# Altium PCB LPCOSensor3vValve.PcbDoc
Units mil, origin at the board's own origin, x right, y up, seen from the top; angles counter-clockwise.
Board outline 1970 x 1970 mil, 2 copper layers (Top Layer, Bottom Layer); 32 components, 32 nets, 110 pads, 39 vias.
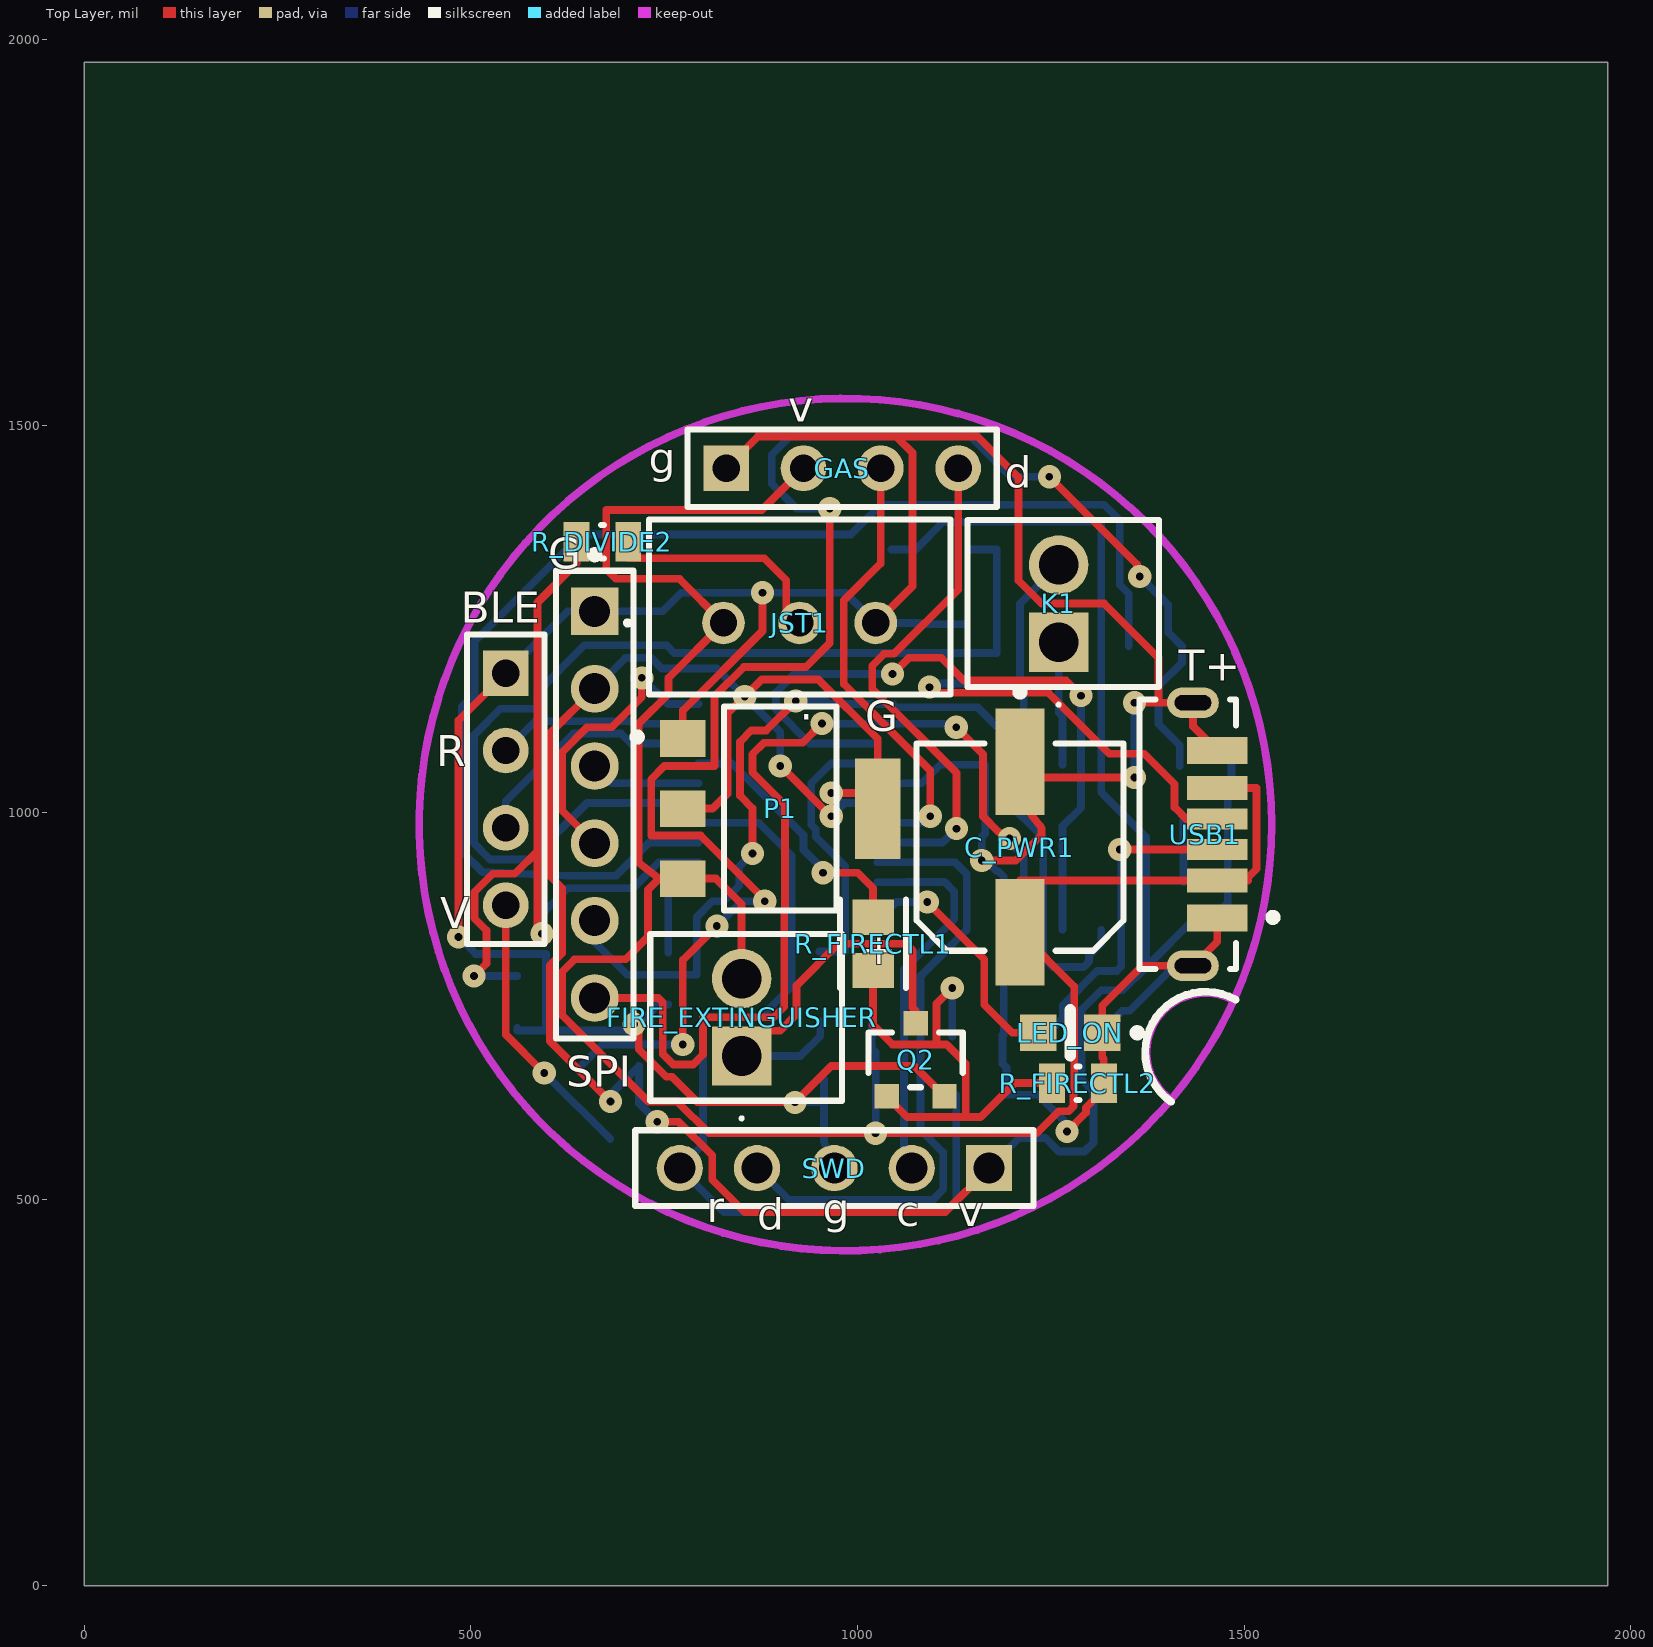
[diagram p0: Top Layer view]
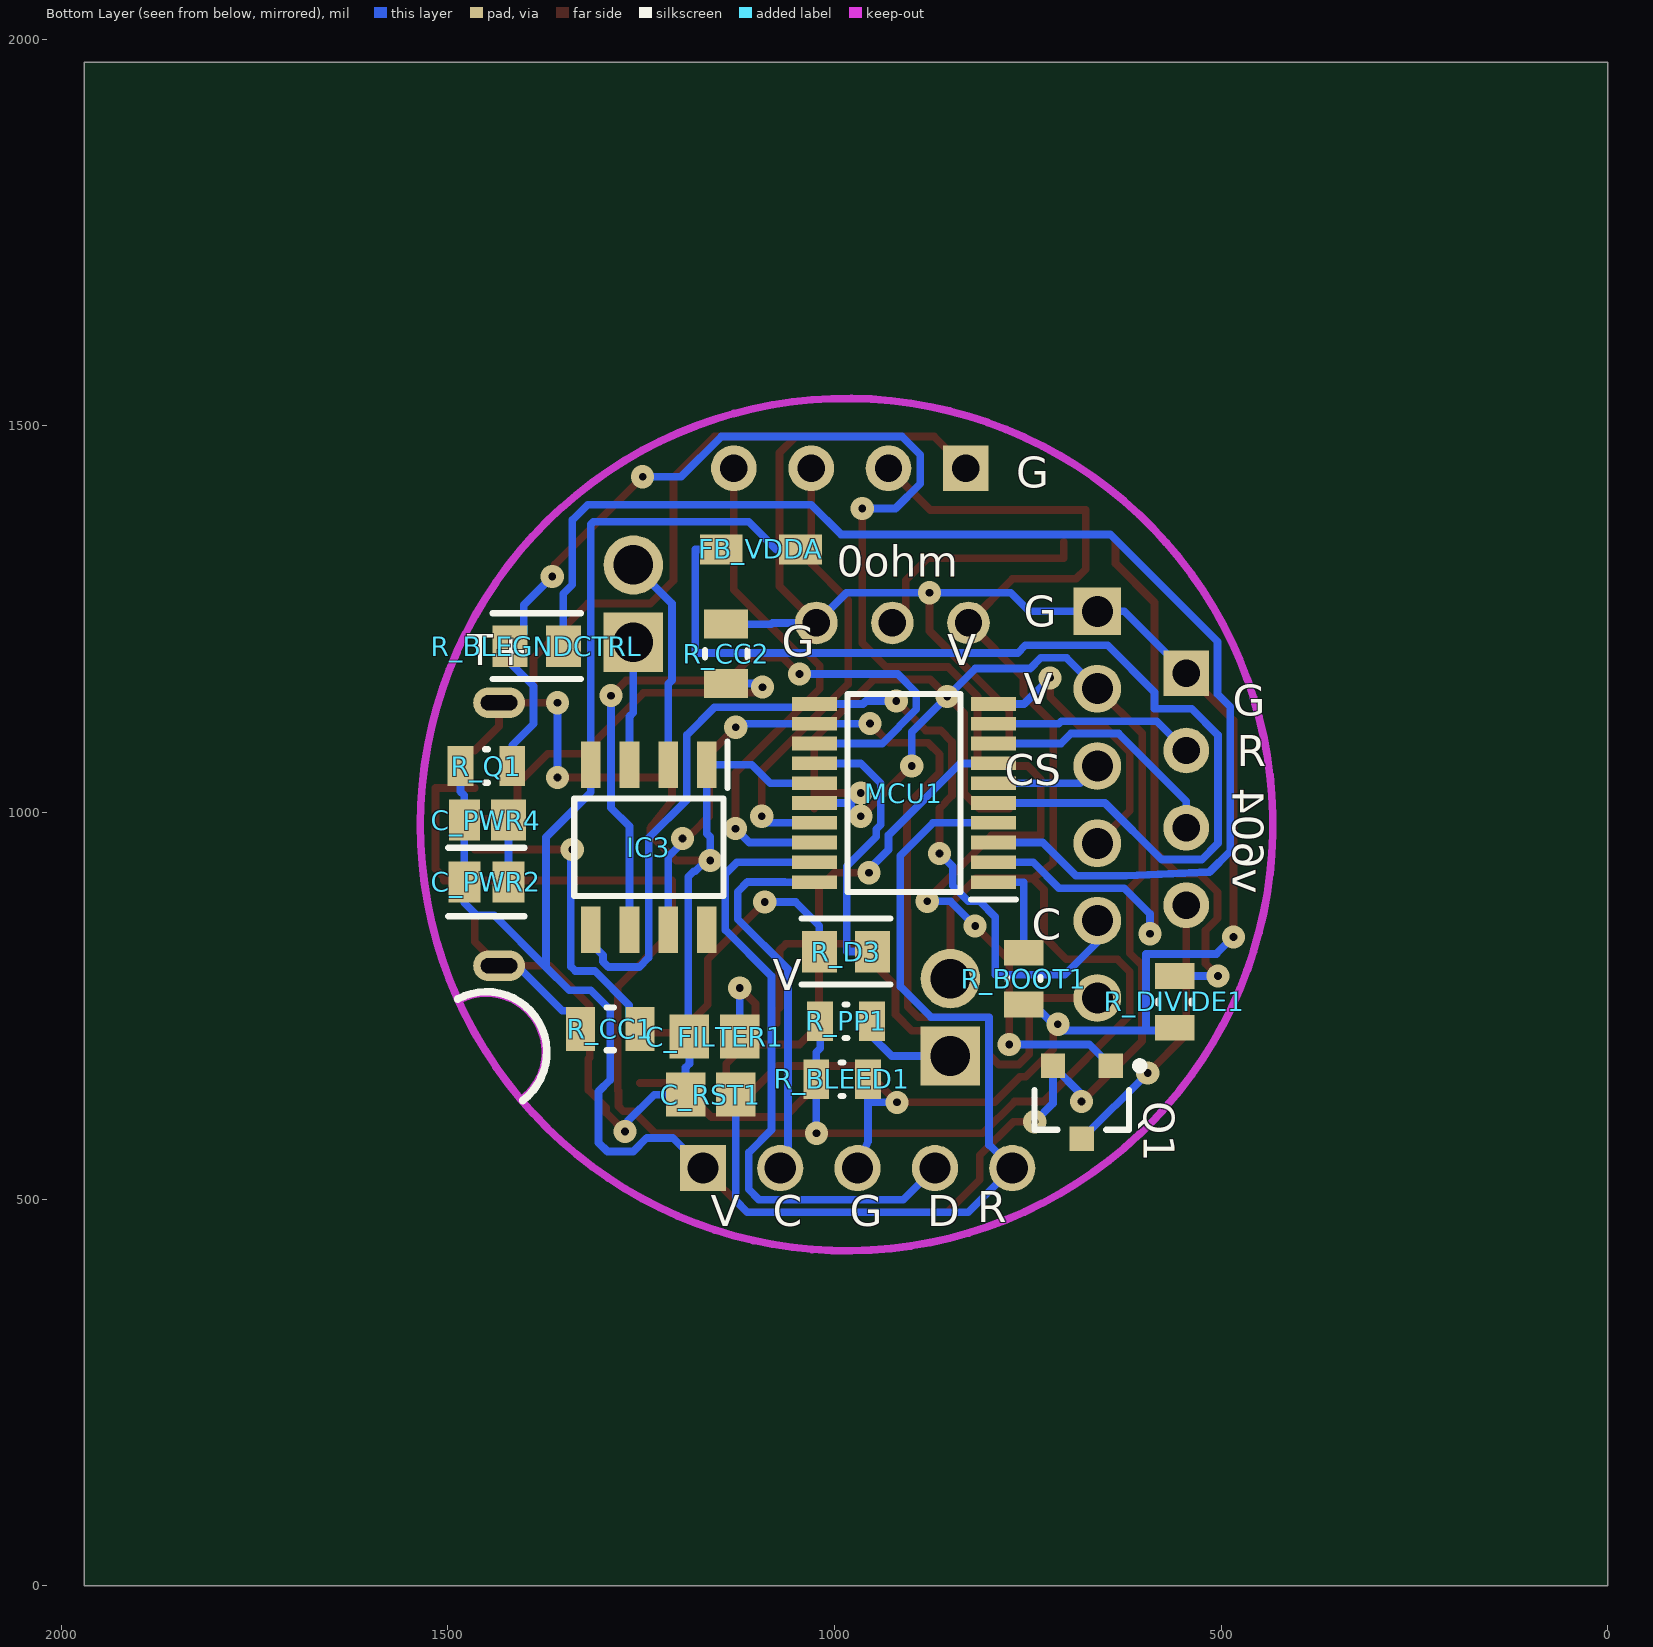
[diagram p1: Bottom Layer view, seen from below]
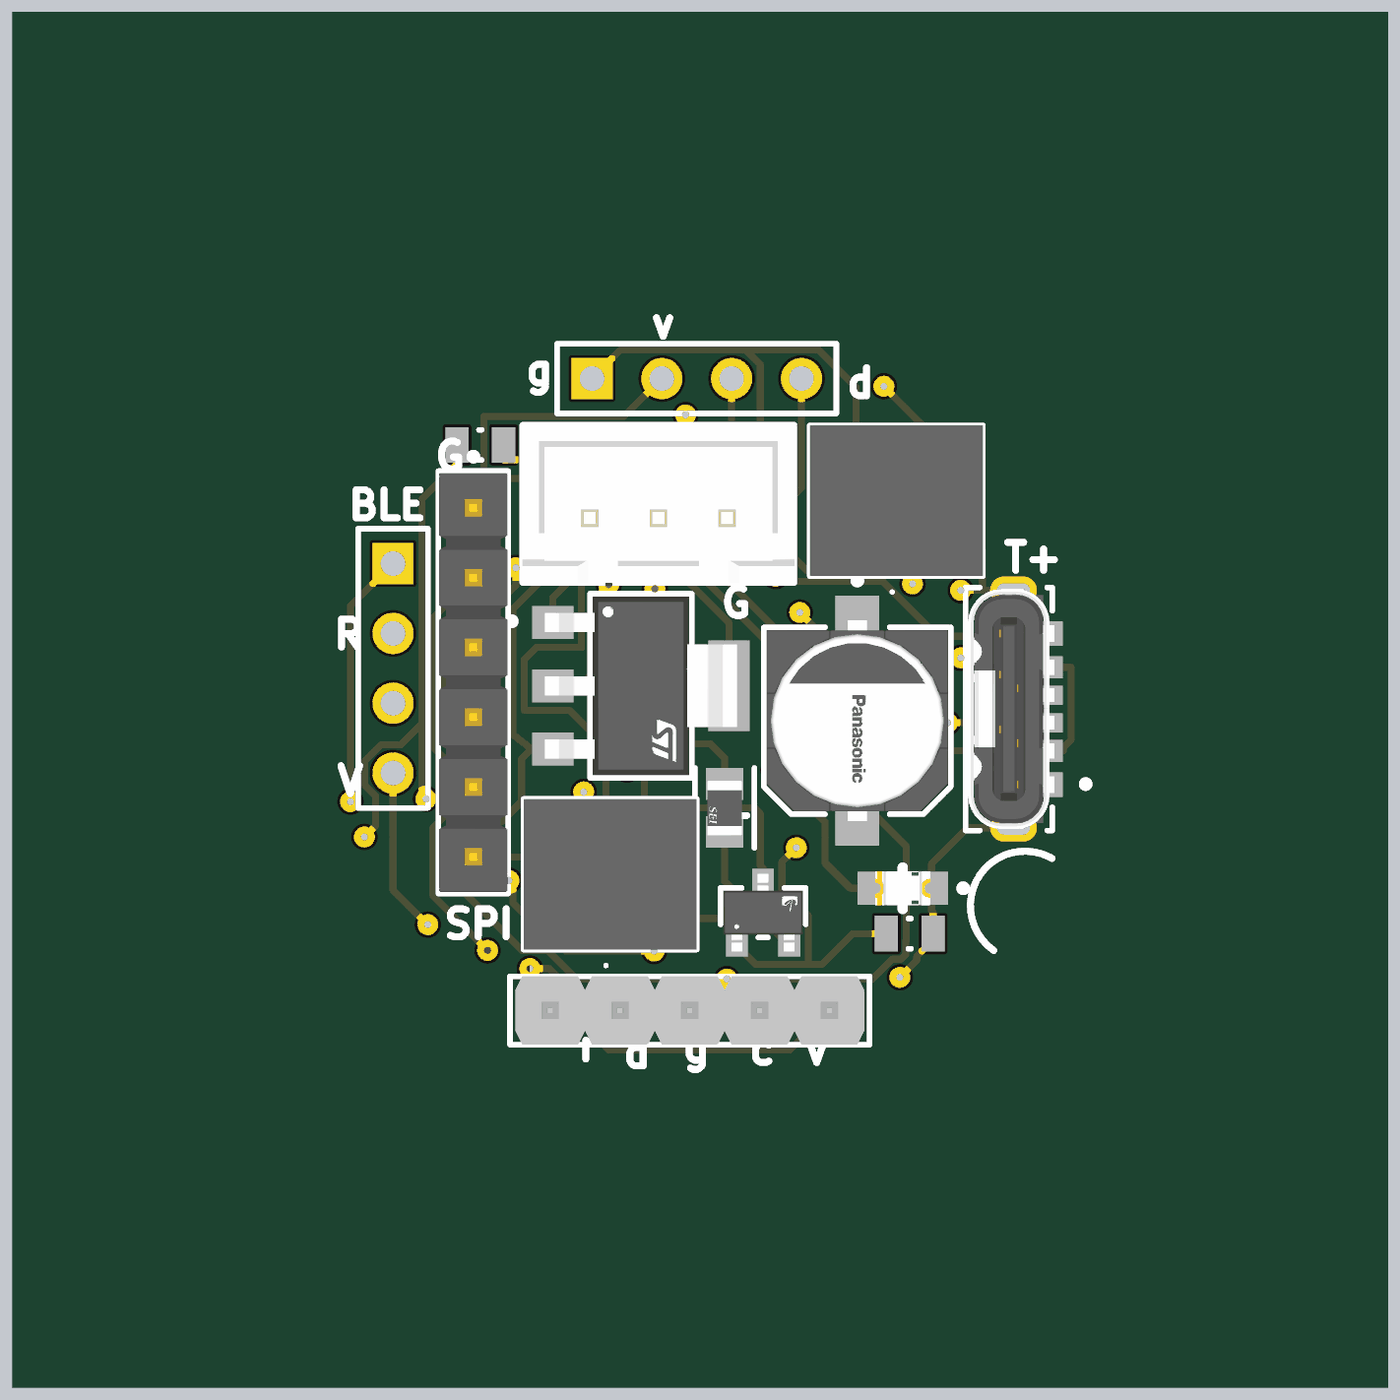
[diagram p2: 3D render of the assembled board from above, using the file's embedded part models]
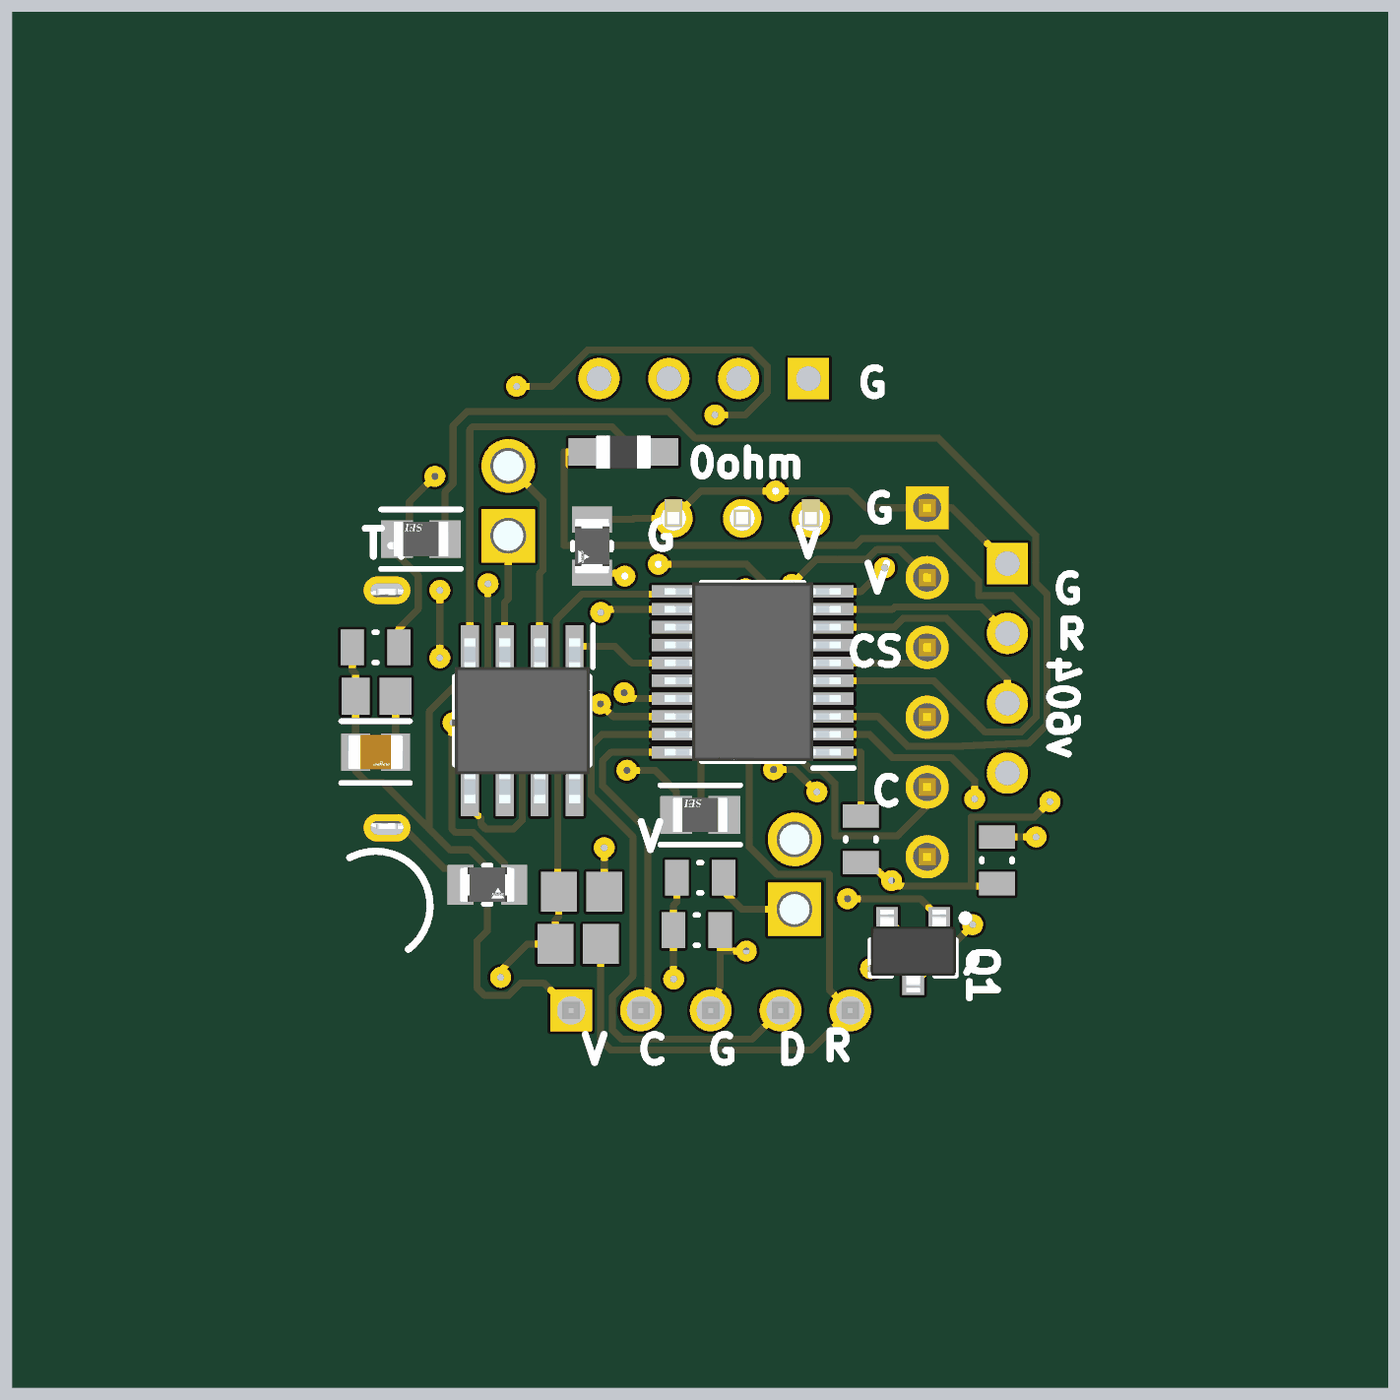
[diagram p3: 3D render of the assembled board from below, using the file's embedded part models]

## Layer stack, top to bottom
Top Solder: solder mask 0.4, Solder Resist, Dk 3.5
Top Layer: signal copper 1.4
Dielectric 1: dielectric 12.6, FR-4, Dk 4.8
Bottom Layer: signal copper 1.4
Bottom Solder: solder mask 0.4, Solder Resist, Dk 3.5

## Board outline
0,0 1970,0 1970,1970 0,1970

## Design rules (kind name [scope] priority, off if disabled: settings)
Clearance [All] p1: gap=6 ignorepadtopadclearanceinfootprint=FALSE except(15: SMDPad-Via THPad-Via)
HoleSize [All] p1: absolutevalues=TRUE maxlimit=100 minlimit=6 maxpercent=80.000 minpercent=20.000
PolygonConnect [All] p1: connectstyle=Relief reliefconductorwidth=10 reliefentries=4 polygonreliefangle="90 Angle" airgapwidth=10
RoutingVias [All] p1: holewidth=10 width=30 viastyle="Through Hole" minholewidth=10 minwidth=30 maxholewidth=28 maxwidth=50
SolderMaskExpansion [All] p1: expansion=4 istentingtop=FALSE
Width [All] p1: maxlimit=30 minlimit=10 preferedwidth=10
29 further rules are at their usual default settings.

## Components (designator, comment, footprint, x,y, rotation, side; value= is the part's Value field where it differs from the comment)
BLE "Header BLE" HDR1X4 545,1180 r270 top
C_FILTER1 "VJ0805Y104MXAAT" CAPC2013X145X48NL20T23 1155,710 r180 bottom
C_PWR1 "16SVPG220M" FP-OS-CON-SMT-C6-MFG 1210,955 r270 top
C_PWR2 "GRM21BR61A476ME15K" FP-GRM21B-0_2-e0_2_0_7-IPC_C 1450,910 r180 bottom
C_PWR4 "08053C103JAT2A" CAPC2013X94X50LL20T25 1450,990 r0 bottom
C_RST1 "VJ0805Y104MXAAT" CAPC2013X145X48NL20T23 1160,635 r180 bottom
FB_VDDA "0ohm" WE-CBF_0805_L2W1.2H0.9_HC 1095,1340 r180 bottom
FIRE_EXTINGUISHER "KF128-2.54-2P" KF1282542P 850,685 r90 top
GAS "Header I2C" HDR1X4 830,1445 r0 top
IC3 "MAX31855JASA+" SOIC127P600X175-8N 1240,955 r270 bottom
JST1 "B3B-XH-A_LF__SN_" B3BXHALFSN 826.57,1245 r0 top
K1 "KF128-2.54-2P" KF1282542P 1260,1220 r90 top
LED_ON "WHITE LED 3.0v20ma" FP-SML-LX0805UWC-TR-MFG 1275,715 r180 top
MCU1 "STM32L031F6P6" SOP65P640X120-20N 910,1025 r0 bottom
P1 "LD1117S33" FP-SOT-223-0046067_14-MFG 900,1005 r0 top
Q1 "AO3401A" AO-SOT-23-3L_V 680,625 r270 bottom
Q2 "AO3400A" FP-SOT23-MFG 1075,680 r90 top
R_BLEED1 "10K 5% 0805(2012)" RESC0805(2012)_L 990,655 r180 bottom value="10000.00 Ohm"
R_BLEGNDCTRL "RMCF0805JT180R" FP-RMCF0805-IPC_B 1385,1215 r0 bottom
R_BOOT1 "10K 5% 0805(2012)" RESC0805(2012)_L 755,785 r270 bottom value="10000.00 Ohm"
R_CC1 "CRCW08055K10JNEAHP" FP-CRCW0805-HPe3-MFG 1290,720 r0 bottom
R_CC2 "CRCW08055K10JNEAHP" FP-CRCW0805-HPe3-MFG 1140,1205 r90 bottom
R_D3 "RMCF0805JT180R" FP-RMCF0805-IPC_B 985,820 r0 bottom
R_DIVIDE1 "10K 5% 0805(2012)" RESC0805(2012)_L 560,755 r90 bottom value="10000.00 Ohm"
R_DIVIDE2 "10K 5% 0805(2012)" RESC0805(2012)_L 670,1350 r0 top value="10000.00 Ohm"
R_FIRECTL1 "RMCF0805JT180R" FP-RMCF0805-IPC_B 1020,830 r270 top
R_FIRECTL2 "10K 5% 0805(2012)" RESC0805(2012)_L 1285,650 r180 top value="10000.00 Ohm"
R_PP1 "10K 5% 0805(2012)" RESC0805(2012)_L 985,730 r180 bottom value="10000.00 Ohm"
R_Q1 "10K 5% 0805(2012)" RESC0805(2012)_L 1450,1060 r180 bottom value="10000.00 Ohm"
SPI "HTSW-106-07-G-S" FP-HTSW-106-07-G-S-MFG 660,1010 r270 top
SWD "MTLW-105-05-T-S-190" SMTC-MTLW-105-05-X-S-190 1170,540 r180 top
USB1 "217178-0001" FP-217178-0001-MFG 1427.01,971.73 r270 top

## Footprints (in the part's own frame and the unit in brackets; to place one, negate y for a bottom-side part, rotate by r counter-clockwise, add the part's x,y. Pads: shape width x height; smd on the part's side, far side on the other; paste and mask are expansions set on the pad)
AO-SOT-23-3L_V [mm] "SOT23, 3-Leads, Body 3.1x1.8mm, Pitch 0.95mm"
  rect 0.8x0.8 smd: 1(-1.2,0.95) 2(-1.2,-0.95) 3(1.2,0)
  silkscreen extent -1.32,-1.55 0.9,2.02, body extent -1.5,-1.55 1.5,1.55, height 1.25
B3BXHALFSN [mm]
  round 1.4 hole 0.9: 1(0,0) 2(2.5,0) 3(5,0)
  silkscreen extent -3.2,-2.35 7.45,3.4, body extent -2.45,-2.35 7.45,3.4, height 7.09
CAPC2013X94X50LL20T25 [mm] "Chip Capacitor, 2-Leads, Body 2.01x1.25mm, IPC High Density"
  rect 1.15x1.35 smd: 1(-0.725,0)
  rect 1.016x1.35 smd: 2(0.725,0)
  body extent -1.1,-0.72 1.1,0.72, height 0.94
CAPC2013X145X48NL20T23 [mm] "Chip Capacitor, 2-Leads, Body 2.00x1.25mm, IPC Medium Density"
  rect 1.3x1.45 smd: 1(-0.825,0) 2(0.825,0)
  body extent -1.1,-0.72 1.1,0.72, height 1.45
FP-217178-0001-MFG [mm]
  rrect100% 1x1.7 hole 1.2 slot 0.5 at 0 deg paste-1000 mask+0: 1(-4.32,0.17) 2(4.32,0.17)
  rect 0.7x1.99 smd paste+0 mask+0: A5(0.5,0.965) B5(-0.5,0.965)
  rect 0.8x1.99 smd paste+0 mask+0: A9(-1.52,0.965) B9(1.52,0.965)
  rect 0.9x1.99 smd paste+0 mask+0: A12(-2.75,0.965) B12(2.75,0.965)
  silkscreen extent -4.42,-1.58 4.42,2.92, body extent -4.92,-1.68 4.92,2.06, height 0.25
FP-CRCW0805-HPe3-MFG [mm]
  rect 0.95x1.45 smd paste+0 mask+0: 1(-0.975,0) 2(0.975,0)
  silkscreen extent -0.13,-0.7 0.12,0.7, body extent -1,-0.63 1,0.63, height 0.6
FP-GRM21B-0_2-e0_2_0_7-IPC_C [mil]
  rect 41.52x53.39 smd paste+0 mask+0: 1(-28.57,0) 2(28.57,0)
  silkscreen extent -49,-44 49,44, body extent -39,-25 39,25, height 57
FP-HTSW-106-07-G-S-MFG [mm]
  rect 1.57x1.57 hole 1.02 paste-1000 mask+0: 1(-6.35,0)
  round 1.57 hole 1.02 paste-1000 mask+0: 2(-3.81,0) 3(-1.27,0) 4(1.27,0) 5(3.81,0) 6(6.35,0)
  silkscreen extent -8.33,-1.27 7.68,1.27, body extent -7.78,-1.37 7.78,1.37, height 0.25
FP-OS-CON-SMT-C6-MFG [mm]
  rect 3.5x1.6 smd paste+0 mask+0: 1(-2.8,0) 2(2.8,0)
  silkscreen extent -5.22,-3.4 3.4,3.4, body extent -4.8,-3.65 4.8,3.65, height 0.25
FP-RMCF0805-IPC_B [mil]
  rect 45.46x53.63 smd paste+0 mask+0: 1(-34.48,0) 2(34.48,0)
  silkscreen extent -57,-43 57,43, body extent -39,-25 39,25, height 26
FP-SML-LX0805UWC-TR-MFG [mm]
  rect 1.2x1.2 smd paste+0 mask+0: 1(-1.05,0) 2(1.05,0)
  silkscreen extent -2.33,-0.75 0,0.75, body extent -1.75,-0.85 1.75,0.85, height 0.25
FP-SOT23-MFG [mm]
  rect 0.8x0.8 smd paste+0 mask+0: 1(-1.2,0.95) 2(-1.2,-0.95) 3(1.2,0)
  silkscreen extent -0.9,-1.55 0.9,1.55, body extent -1.7,-1.78 1.7,1.78, height 0.25
FP-SOT-223-0046067_14-MFG [mm]
  rect 1.5x1.2 smd paste+0 mask+0: 1(-3.2,2.3) 2(-3.2,0) 3(-3.2,-2.3)
  rect 1.5x3.3 smd paste+0 mask+0: 4(3.2,0)
  silkscreen extent -4.82,-3.35 1.85,3.35, body extent -4.05,-3.45 4.05,3.45, height 0.25
HDR1X4 [mm] "Connector; Header; 4 Position"
  rect 1.5x1.5 hole 0.9: 1(0,0)
  round 1.5 hole 0.9: 2(2.54,0) 3(5.08,0) 4(7.62,0)
  silkscreen extent -1.27,-1.27 8.89,1.27
KF1282542P [mm]
  rect 1.95x1.95 hole 1.3: 1(0,0)
  round 1.95 hole 1.3: 2(2.54,0)
  silkscreen extent -2.1,-3.3 4.01,3, body extent -1.47,-3.3 4.01,3, height 9.2
RESC0805(2012)_L [mm] "Chip Resistor, Body 2.0x1.3mm, IPC High Density"
  rect 0.85x1.3 smd: 1(-0.85,0) 2(0.85,0)
  silkscreen extent -0.05,-0.55 0.05,0.55, body extent -1.1,-0.67 1.1,0.68, height 0.7
SMTC-MTLW-105-05-X-S-190 [mm] "Terminal Assembly, 1x5 Pins, Vertical, 2.54mm Pitch, Male"
  rect 1.52x1.52 hole 1.02: 1(0,0)
  round 1.52 hole 1.02: 2(2.54,0) 3(5.08,0) 4(7.62,0) 5(10.16,0)
  silkscreen extent -1.46,-1.24 11.62,1.24, body extent -1.27,-1.24 11.43,1.24, height 6.35
SOIC127P600X175-8N [mm]
  rect 1.525x0.65 smd: 1(-2.712,1.905) 2(-2.712,0.635) 3(-2.712,-0.635) 4(-2.712,-1.905) 5(2.712,-1.905) 6(2.712,-0.635) 7(2.712,0.635) 8(2.712,1.905)
  silkscreen extent -3.47,-2.45 1.6,2.58, body extent -3,-2.45 3,2.45, height 1.75
SOP65P640X120-20N [mm]
  rect 1.475x0.45 smd: 1(-2.938,2.925) 2(-2.938,2.275) 3(-2.938,1.625) 4(-2.938,0.975) 5(-2.938,0.325) 6(-2.938,-0.325) 7(-2.938,-0.975) 8(-2.938,-1.625) 9(-2.938,-2.275) 10(-2.938,-2.925) 11(2.938,-2.925) 12(2.938,-2.275) 13(2.938,-1.625) 14(2.938,-0.975) 15(2.938,-0.325) 16(2.938,0.325) 17(2.938,0.975) 18(2.938,1.625) 19(2.938,2.275) 20(2.938,2.925)
  silkscreen extent -3.68,-3.25 1.85,3.5, body extent -3.2,-3.25 3.2,3.25, height 1.2
WE-CBF_0805_L2W1.2H0.9_HC [mm] "SMD EMI Suppression Ferrite  Bead, body 2.00x1.20mm"
  rect 1.4x1 smd: 1(-1.3,0) 2(1.3,0)
  body extent -1,-0.6 1,0.6, height 0.9

## Part data
BLE GAS: library part "Header 4", "Header, 4-Pin", LatestRevisionDate=17-Jul-2002, LatestRevisionNote="Re-released for DXP Platform.", Publisher="Altium Limited"
C_FILTER1 C_RST1: library part CMP-2007-01733-1, Manufacturer=Vitramon, Part Number=VJ0805Y104MXAAT
C_PWR1: library part CMP-05428-000859-1, "Conductive Polymer Aluminum Solid Capacitors (OS-CON) 220uF ±20% 16V"
C_PWR2: library part CMP-06035-042633-1, "Chip Multilayer Ceramic Capacitors for General Purpose, 0805, 47uF, X5R, 15%, 20%, 10V", Capacitance=47uF, Case Code (Imperial)=0805, Case Code (Metric)=2012, Dielectric=X5R, Max Operating Temperature=85°C, Min Operating Temperature=-55°C, Package Quantity=10000, Tolerance=20%, Voltage Rating=10V, Case/Package=0805, Length=0.079inch, Mount="Surface Mount", Packaging="Tape and Reel", Termination=SMD/SMT, Thickness=0.057inch, Voltage Rating (DC)=10V, Weight=0.000335oz, Width=0.049inch
C_PWR4: library part CMP-2007-04234-1, Manufacturer="AVX Interconnect / Elco", Part Number=08053C103JAT2A
FB_VDDA: library part CMP-0220-00029-2, Case Code (Imperial)=0805, Case Code (Metric)=2012, Case/Package=SMD/SMT, Current Rating=2A, DC Resistance (DCR)=50mΩ, Inductance=5.6H, Max Operating Temperature=125°C, Min Operating Temperature=-55°C, Test Frequency=100MHz, Tolerance=25%, Core Material=Ferrite, Depth=1.2mm, Height=900µm, Impedance=220Ω, Lead Free="Lead Free", Length=2mm, Material=Ferrite, Max Current Rating=2A, Max DC Current=2A, Mount="Surface Mount", NexarPartId=7861696, Number of Lines=1, Packaging=Digi-Reel®, REACH SVHC=Unknown, Resistance=50mΩ, RoHS=Compliant, Termination=SMD/SMT, Weight=10.999615mg, Width=1.2mm
FIRE_EXTINGUISHER K1: "Connector", Manufacturer_Name="CIXI KEFA ELECTRONICS", Datasheet Link=https://jirorwxhqiillo5p.ldycdn.com/KF128-2.54-aidqpBpqKirRliSqmrqirlki.pdf, Height=9.1mm, Manufacturer_Part_Number=KF128-2.54-2P
IC3: "Integrated Circuit", Manufacturer_Name="Analog Devices", Mouser Part Number=700-MAX31855JASA+, Arrow Part Number=MAX31855JASA+, Arrow Price/Stock=https://www.arrow.com/en/products/max31855jasa/analog-devices?utm_currency=USD&region=nac, Datasheet Link=https://datasheets.maximintegrated.com/en/ds/MAX31855.pdf, Height=1.75mm, Manufacturer_Part_Number=MAX31855JASA+, Mouser Price/Stock=https://www.mouser.co.uk/ProductDetail/Analog-Devices-Maxim-Integrated/MAX31855JASA%2b?qs=4Rc5iGDDRGgfomCSqMwnEw%3D%3D
JST1: "Connector", Arrow Part Number=B3B-XH-A(LF)(SN), Manufacturer_Name="JST (JAPAN SOLDERLESS TERMINALS)", Mouser Part Number=306-B3BXHALFSNP, Arrow Price/Stock=https://www.arrow.com/en/products/b3b-xh-a-lf-sn_1/jst-manufacturing.html?utm_currency=USD&region=europe, Datasheet Link=https://datasheet.lcsc.com/szlcsc/1812131720_JST-Sales-America-B3B-XH-A-LF-SN_C144394.pdf, Height=7mm, Manufacturer_Part_Number=B3B-XH-A(LF)(SN), Mouser Price/Stock=https://www.mouser.co.uk/ProductDetail/JST-Commercial/B3B-XH-ALFSN?qs=cdbOS8ANM9BVkoboCCIEMQ%3D%3D
LED_ON: library part CMP-00229-00139794-1, "SML-LX0805UWC-TR White LED, 0805 Diffused, Rectangle Lens SMD package", Case/Package=0805, Forward Current=20mA, Forward Voltage=3.5V, Illumination Color=White, Lens Color="Clear, Yellow", Max Operating Temperature=85°C, Min Operating Temperature=-40°C, Power Rating=120mW, Approvals="CSA, UL", Luminous Intensity=150mcd, Mount="Surface Mount", NexarPartId=139794, Number of LEDs=1, RoHS=Compliant, Viewing Angle=120°
MCU1: "Integrated Circuit", Manufacturer_Name=STMicroelectronics, Mouser Part Number=511-STM32L031F6P6, Arrow Part Number=STM32L031F6P6, Arrow Price/Stock=https://www.arrow.com/en/products/stm32l031f6p6/stmicroelectronics?utm_currency=USD&region=nac, Datasheet Link=https://www.st.com/resource/en/datasheet/stm32l031g4.pdf, Height=1.2mm, Manufacturer_Part_Number=STM32L031F6P6, Mouser Price/Stock=https://www.mouser.co.uk/ProductDetail/STMicroelectronics/STM32L031F6P6?qs=dTJS0cRn7ohDt6e1EJh76Q%3D%3D
P1: library part CMP-0244-00307-2, "IC REG LINEAR 3.3V 800MA SOT223", Case/Package=SOT-223, Dropout Voltage=1.1V, Input Bias Current=5mA, Max Input Voltage=15V, Max Operating Temperature=125°C, Max Output Current=1.3A, Max Output Voltage=3.3V, Max Power Dissipation=12W, Min Input Voltage=5.3V, Min Operating Temperature=-40°C, Output Current=950mA, Output Voltage Accuracy=1%, Package Quantity=1, Quiescent Current=10mA, Accuracy=1%, Contact Plating=Tin, Height=1.8mm, Lead Free="Lead Free", Length=6.5mm, Max Supply Voltage=15V, Min Output Voltage=3.3V, Min Supply Voltage=3.3V, Mount="Surface Mount", Nominal Output Voltage=3.3V, Number Of Outputs=1, Number of Pins=4, Number of Regulators=1, Number of Terminals=4, Output Type=Fixed, Output Voltage=3.3V, Packaging="Tape and Reel", Polarity=Positive, Power Dissipation=12W, Radiation Hardening=No, REACH SVHC="No SVHC", Termination=SMD/SMT, Weight=0.01lb, Width=3.5mm
Q1: library part CMP-2000-05778-1, "P-Channel MOSFET, 30 V, 4 A, -55 to 150 degC, 3-Pin SOT-23-3L, RoHS, Tape and Reel", Continuous Drain Current=4A, Drain-Source On-Volt=30V, Frequency (Max)=NotRequiredMHz, Gate-Source Voltage (Max)=?12V, Manufacturer="Alpha and Omega", Operating Temp Range=-55Cto150C, Operating Temperature Classification=Military, Output Power (Max)=NotRequiredW, Package Description="3-Pin Small Outline Transistor, Body 2.95 x 1.6 mm, Pitch 0.95 mm", Package Reference=SOT-23-3L, Package Type=SOT-23, Power Dissipation=1.4W, Power Gain=NotRequireddB, Channel Mode=Enhancement, Datasheet URL=http://www.aosmd.com/res/data_sheets/AO3401A.pdf, Datasheet Version="Rev. 3, 03/2011", Drain Current (Max)=4A, Drain Efficiency=NotRequired%, Drain-Source On-Res=0.044ohm, Manufacturer URL=http://www.aosmd.com/, Mounting=SurfaceMount, Mounting Technology=SurfaceMount, Noise Figure=NotRequireddB, Number of  Elements=1, Package URL=http://www.aosmd.com/res/packaging_information/SOT-23-3L.pdf, Pin Count=3, Polarity=P, Rad Hardened=No, Type=PowerMOSFET
Q2: library part CMP-83955-000006-1, "MOSFET N-CH 30V 5.7A SOT23", Case/Package=SOT-23, Continuous Drain Current (ID)=5.7A, Drain to Source Voltage (Vdss)=30V, Gate to Source Voltage (Vgs)=12V, Input Capacitance=630pF, Max Operating Temperature=150°C, Max Power Dissipation=1.4W, Min Operating Temperature=-55°C, Lead Free="Lead Free", Mount="Surface Mount", Number of Elements=1, Number of Pins=3, Packaging="Tape and Reel", Power Dissipation=1.4W, Radiation Hardening=No, Rds On Max=26.5mR
R_BLEED1 R_BOOT1 R_DIVIDE1 R_DIVIDE2 R_FIRECTL2 R_PP1 R_Q1: library part CMP-1013-00098-1, "10K 0.125W 5% 0805 (2012 Metric)  SMD", Case-EIA=0805, Case-Metric=2012, Power="0.125 W", Tolerance="5 %", Technology=SMT
R_BLEGNDCTRL R_D3 R_FIRECTL1: library part CMP-26527-003283-1, "180Ω ±5% 0.125W 0805 Thick Film Chip Resistor AEC-Q200 compliant", Case Code (Imperial)=0805, Case Code (Metric)=2012, Max Operating Temperature=155°C, Max Power Dissipation=125mW, Min Operating Temperature=-55°C, Resistance=180R, Resistor Type="Thick Film", Temperature Coefficient=200ppm/°C, Tolerance=5%, Case/Package=0805, Construction=Rectangular, Contact Plating=Tin, Depth=1.25mm, Features="Automotive AEC-Q200", Height=0.026inch, Lead Free="Lead Free", Length=0.079inch, Military Standard=Not, Mount="Surface Mount", Number of Terminations=2, Packaging="Tape and Reel", Radiation Hardening=No, RoHS Compliant=Yes, Series=RMCF, Width=0.049inch
R_CC1 R_CC2: library part CMP-02407-002962-1, "RES Thick Film, 5.1kΩ, 5%, 0.5W, 200ppm/°C, 0805", Case/Package=0805, Max Operating Temperature=155°C, Max Power Dissipation=500mW, Min Operating Temperature=-55°C, Package Quantity=5000, Resistance=5.1kR, Temperature Coefficient=200ppm/°C, Tolerance=5%, Composition="Thick Film", Features="Automotive AEC-Q200", Height=0.024inch, Lead Free="Lead Free", Length=0.079inch, Number of Terminations=2, Packaging="Tape and Reel", Width=0.049inch
SPI: library part CMP-02766-001515-1, "CONN HEADER VERT 6POS 2.54MM", Color=Natural, Flammability Rating="UL94 V-0", Max Current Rating=7.6A, Max Operating Temperature=125°C, Max Voltage Rating (AC)=550V, Min Operating Temperature=-55°C, Connector Type=Header, Contact Finish - Mating=GOLD, Contact Material=Bronze, Contact Mating Length=0.23inch, Contact Plating=Gold, Contact Shape=Square, Contact Type="Male Pin", Depth=2.48mm, Fastening Type=Pull, Gender=Male, Housing Color=Natural, Housing Material=Polymer, Insulation Color=Natural, Insulation Material=Polymer, Lead Free="Lead Free", Length=15.24mm, Mount="Through Hole", Number of Contacts=6, Number of Positions=6, Number of Rows=1, Orientation=Straight, Packaging=Rail/Tube, Pitch=0.1inch, Radiation Hardening=No, REACH SVHC="No SVHC", RoHS Compliant=Yes, Series=HTSW, Termination=Solder
SWD: library part CMP-1024-00077-1, "Low Profile .025\" SQ Post Header, Through-hole, Vertical, -55 to 105 degC, 2.54 mm Pitch, 5-Pin, Male, RoHS", Manufacturer=Samtec, Temperature Range="-55 to 105 degC", ComponentLink1Description="Manufacturer URL", ComponentLink1URL=http://www.samtec.com, ComponentLink2Description=Datasheet, ComponentLink2URL=http://www.samtec.com/documents/webfiles/pdf/MTLW_TH.PDF, ComponentLink3Description="Package Specification", ComponentLink3URL=http://www.samtec.com/documents/webfiles/cpdf/MTLW-1XX-XX-XX-X-XXX-XX-XX-MKT1.pdf, DatasheetVersion=F-214, Mounting Technology=Through-hole, Orientation=Vertical, PackageDescription="Low Profile Terminal Assembly", PackageReference=MTLW-105-05-X-S-190, PackageVersion="T, 6/1991", PartNumber=MTLW-105-05-T-S-190, Pitch="2.54 mm", RoHS=True
USB1: library part CMP-04767-000032-1, "CONN RCPT USB2.0 TYP C 24POS SMD"

## Via types
v1: diameter 30, hole 10, Top Layer to Bottom Layer, 39 vias

## Nets (pads, with @x,y where several pads share a name; then routed paths per layer and width w, separated by ;. In a path a pad name is that pad's centre, name@x,y a point inside that pad or via, vN(x,y) a via of type N, cw(c..) or ccw(c..) an arc to the next point about the centre after c; other vN are vias at no path point)
3V3: C_PWR2.1 C_PWR4.2 FB_VDDA.2 IC3.4 MCU1.16 P1.2 P1.4 Q1.2 R_Q1.1 SPI.2 SWD.1 | length 4002.8
  Top Layer w10: SPI.2 602,1102 602,918 618,902 618,817.91 602.09,802 602.09,704.31 v1(680.4,626) ; v1(741,600) 768.42,600 812,556.42 812,525 853.92,483.08 1113.08,483.08 SWD.1 ; P1.2 812.5,1005 832,1024.5 832,1128 875.92,1171.92 949.08,1171.92 1025.98,1095.02 P1.4@1025.98,1025 ; v1(900,1060) 900.5,1060 965.5,995 v1(966,995) ; v1(966,1025) P1.4@1025.98,1025 ; P1.4 P1.4@1025.98,1025
  Bottom Layer w10: SPI.2 700,1200 733,1200 747,1186 818,1186 900,1104 v1(900,1060) ; v1(680.4,626) 680.4,635.24 Q1.2 717.4,623.6 v1(741,600) ; v1(966,995) 983.2,1012.2 ; v1(966,1025) 978.8,1012.2 983.2,1012.2 ; MCU1.16 983.2,1012.2 ; FB_VDDA.2 1075,1340 1110.71,1375.71 1311.54,1375.71 1315,1372.26 IC3.4 1315,1026 1320,1021 1373,968 1373,954.77 1373,800 ; SWD.1 1209.06,579.06 1242.43,579.06 1260.08,561.41 1293.45,561.41 1305,572.96 1305,639.04 1290,654.04 1290,745 1315,770 1343,770 1373,800 ; 1478.57,949 C_PWR2.1 1478.57,883.07 1462.5,867 1440,867 1373,800 ; 1478.54,949.03 C_PWR4.2 1478.54,1022 1483.46,1026.92 R_Q1.1
  other v1: 854,1150
5V: C_PWR1.2 FIRE_EXTINGUISHER.2 GAS.2 JST1.1 P1.3 R_BLEED1.1 R_PP1.1 USB1.A9 USB1.B9 | length 3084.8
  Top Layer w10: FIRE_EXTINGUISHER.2 850,881.22 816.78,914.45 P1.3 743.45,914.45 ; GAS.2 876,1391 675,1391 675,1314.5 687.5,1302 769.57,1302 JST1.1 755.55,1173.98 755.55,1153.55 717,1115 717,934.95 743.45,914.45 ; USB1.A9 1516,1031.57 1516,927 1505,916 1505,911.89 USB1.B9 1210,911.89 C_PWR1.2 1280,774.76 1280,640.36 1279.27,639.63 1279.27,619.85 1272.82,613.41 1260.16,613.41 1231.76,585 v1(1023,585) 808,585 767,626 729.59,626 618.09,737.5 618.09,794.09 634,810 700,810 729,839 729,900 743.45,914.45
  Bottom Layer w10: R_PP1.1 1018.46,695 1023.46,690 R_BLEED1.1 1023.46,585.46 v1(1023,585)
ATREBOOT: MCU1.3 R_BLEGNDCTRL.1 | length 1696.9
  Bottom Layer w10: MCU1.3 730.43,961.02 687.5,918.09 622.91,918.09 515,923 488,950 488,1136.53 504.47,1153 504.47,1220.53 643.42,1359.47 991.53,1359.47 1030.06,1398 1319,1398 1339,1378 1339,1294.23 1350.52,1282.71 R_BLEGNDCTRL.1
BLEVCC: BLE.4 Q1.3 | length 358.2
  Top Layer w10: BLE.4 545,712.76 v1(594.87,662.88)
  Bottom Layer w10: v1(594.87,662.88) Q1.3
FIRE_EXT: MCU1.7 R_FIRECTL1.1 | length 343.8
  Top Layer w10: v1(955.23,922) 1000,922 1020,902 R_FIRECTL1.1
  Bottom Layer w10: MCU1.7 837.31,1063.39 930,970.69 930,951.63 955.23,926.4 v1(955.23,922)
FIRE_EXT_FET: C_FILTER1.2 Q2.1 R_FIRECTL1.2 R_FIRECTL2.2 | length 668
  Top Layer w10: R_FIRECTL1.2 1020,725 1045,700 1102,700 ; Q2.1 1064.35,606 1140,606 ; v1(1122.52,773) 1102,752.48 1102,700 ; R_FIRECTL2.2 1203,650 1159,606 1140,606 ; 1102,700 1115,700 1140,675 1140,606
  Bottom Layer w10: C_FILTER1.2 v1(1122.52,773)
GND: BLE.1 C_FILTER1.1 C_PWR1.1 C_RST1.1 GAS.1 IC3.1 JST1.3 LED_ON.1 MCU1.15 P1.1 Q2.2 R_BLEED1.2 R_BOOT1.2 R_CC1.2 R_CC2.2 R_DIVIDE1.1 R_FIRECTL2.1 SPI.1 SWD.3 USB1.1 USB1.2 USB1.A12 USB1.B12 | length 5285.1
  Top Layer w10: v1(484,839) 484,1119 BLE.1 ; v1(711,726) 717,726 717,693.68 752.68,658 760,658 793,625 v1(919,625) 966,672 1073.16,672 Q2.2 ; P1.1 774.02,1131.64 877,1234.63 v1(877,1284) ; GAS.1 871,1486 1050,1486 ; JST1.3 1071,1292.57 1071,1465 1050,1486 ; v1(1160.5,937.66) 1204.66,937.66 1235.68,968.68 1237.86,970.86 1237.86,979.14 1236.42,981.99 1210,1015.1 C_PWR1.1@1210,1045 ; C_PWR1.1 C_PWR1.1@1210,1045 ; v1(1270.93,587.41) 1295.27,611.74 1295.27,617.95 1318.46,641.14 1318.46,681 1316.34,683.13 LED_ON.1 1316.34,750 1367.99,801.65 USB1.2 1465,832.95 USB1.B12 ; v1(1358,1045) C_PWR1.1@1210,1045 ; v1(1358,1141.81) 1389,1141.81 ; USB1.A12 1433.7,1111.3 USB1.1 1389,1141.81 ; 1050,1486 1155.2,1486 1208,1433.2 1208,1300 1238,1270 1319,1270 1389,1200 1389,1141.81
  Bottom Layer w10: v1(484,839) 506,817 597,817 597,718 ; BLE.1 625,1260 SPI.1 748,1260 772,1284 v1(877,1284) 984.43,1284 JST1.3 1080,1245 1081.61,1243.39 R_CC2.2 ; R_DIVIDE1.1 560,718 597,718 ; v1(711,726) v1@703,718 ; R_BOOT1.2 742,751.54 708.46,718 v1@703,718 ; v1(919,625) 956.54,625 ; R_BLEED1.2 956.54,625 ; SWD.3 956.54,574.54 956.54,625 ; MCU1.15 1083,1037.8 1106.98,1061.77 IC3.1 1165,972.66 1160.5,968.17 1160.5,942.16 v1@1165,937.66 ; v1(1160.5,937.66) 1165.92,937.66 1179.85,923.73 1181.93,923.73 1189,916.66 1189,712 1187.48,712 C_FILTER1.1 1187.48,675 1192.48,670 C_RST1.1 1233.07,635 1267.11,600.96 1267.11,591.24 v1(1270.93,587.41) ; R_CC1.2@1328.7,720.32 1328.7,730.16 1342.09,743.54 1351.93,743.54 1404.42,796.03 1428.08,796.03 USB1.2 ; v1(1358,1045) v1(1358,1141.81) ; 597,718 v1@703,718
I2C1_SCL: GAS.3 MCU1.17 | length 588
  Top Layer w10: GAS.3 1030,1322 982,1274 982,1166.19 1094,1054.19 v1(1094,995.06)
  Bottom Layer w10: MCU1.17 1085.56,986.61 v1(1094,995.06)
I2C1_SDA: GAS.4 MCU1.18 | length 674.4
  Top Layer w10: v1(1128,979) 1128,1051 1019,1160 1019,1189.79 1034.23,1205.02 1047.02,1205.02 1130,1288 GAS.4
  Bottom Layer w10: MCU1.18 1110.02,961.02 v1(1128,979)
IND_LED: MCU1.14 R_D3.1 | length 365.6
  Bottom Layer w10: R_D3.1 984,820 984,930.42 946,968.42 946,978.23 940,984.23 940,1037.5 965.89,1063.39 MCU1.14
LIQ: JST1.2 R_DIVIDE2.2 | length 299.6
  Top Layer w10: R_DIVIDE2.2 703.46,1328.56 879.05,1328.56 907.61,1300 907.61,1262.39 JST1.2
LIQ_SIG: MCU1.2 R_DIVIDE1.2 R_DIVIDE2.1 | length 1067.2
  Top Layer w10: v1(504,788.46) 520,804.46 520,847.68 504.47,863.21 504.47,896.79 528.21,920.53 556.53,920.53 586,950 ; v1(592,843) 586,849 586,950 ; R_DIVIDE2.1 636.54,1322 586,1271.46 586,950
  Bottom Layer w10: v1(504,788.46) R_DIVIDE1.2 ; v1(592,843) 592,869 625,902 709.57,902 743,935.43 MCU1.2
NetC_PWR2_2: C_PWR2.2 C_PWR4.1 | length 80
  Bottom Layer w10: C_PWR2.2 1421.43,949 ; 1421.46,949.03 C_PWR4.1
NetFIRE_EXTINGUISHER_1: FIRE_EXTINGUISHER.1 Q2.3 R_PP1.2 | length 533.9
  Top Layer w10: FIRE_EXTINGUISHER.1 882.75,717.75 900,717.75 921,738.75 921,776 975,830 1062.5,830 1071,821.5 1071,747.36 1075,743.36 Q2.3
  Bottom Layer w10: FIRE_EXTINGUISHER.1 926,685 951.54,710.54 R_PP1.2
NetLED_ON_2: LED_ON.2 R_D3.2 | length 364.9
  Top Layer w10: v1(1090,884) 1163.82,810.18 1163.82,751.18 1200,715 LED_ON.2
  Bottom Layer w10: R_D3.2 1019.48,853.48 1050,884 v1(1090,884)
NetMCU1_1: MCU1.1 R_BOOT1.1 | length 130.7
  Bottom Layer w10: R_BOOT1.1 755,909.84 MCU1.1
NetQ1_1: Q1.1 R_BLEGNDCTRL.2 R_Q1.2 | length 2161.5
  Top Layer w10: v1(774,700) 774,809 v1(818,853) ; v1(880,885) 880,887 797,970 733,970 733,1043 750,1060 815,1060 815,1150 852.92,1187.92 932.92,1187.92 964,1219 v1(964,1393) ; v1(1248,1434) 1361.17,1320.83 1361.17,1308.83 v1(1365,1305)
  Bottom Layer w10: Q1.1 670.35,700 v1(774,700) ; v1(818,853) 850,885 v1(880,885) ; v1(964,1393) 921,1393 889,1425 889,1462.5 912.5,1486 1146.32,1486 1198.32,1434 v1(1248,1434) ; v1(1365,1305) 1401.75,1268.25 1401.75,1232.73 R_BLEGNDCTRL.2 1419.48,1193.48 1389,1163 1389,1114.54 1416.54,1087 R_Q1.2
NetR_CC1_1: R_CC1.1 USB1.A5 | length 410.6
  Top Layer w10: v1(1339,952) v1(1339,952) USB1.A5
  Bottom Layer w10: R_CC1.1 1265.31,733.7 1265.31,750.31 1310,795 1335.14,795 1341,800.86 1341,950 v1(1339,952)
NetR_CC2_1: R_CC2.1 USB1.B5 | length 509.2
  Top Layer w10: v1(1093,1162) 1100.39,1154.61 1246.76,1154.61 1325.4,1075.97 1370.53,1075.97 1409.96,1036.54 1409.96,1006.46 1425,991.42 USB1.B5
  Bottom Layer w10: v1(1093,1162) 1097.61,1166.61 R_CC2.1
NRST: C_RST1.2 MCU1.4 SWD.5 | length 1170.5
  Bottom Layer w10: MCU1.4 872.39,986.61 915,944 915,775 875,735 800,735 800,570 SWD.5 826.92,483.08 1112.5,483.08 1127.52,498.1 C_RST1.2
SPI1_CS1: IC3.6 MCU1.13 | length 918.3
  Top Layer w10: v1(1045,1179.02) 1045.46,1179.02 1066.44,1200 1108,1200 1137.39,1170.61 1269.39,1170.61 v1(1289,1151)
  Bottom Layer w10: MCU1.13 938.25,1088.98 894,1133.23 894,1154.77 918.25,1179.02 v1(1045,1179.02) ; IC3.6 1265,982 1289,1006 v1(1289,1151)
SPI1_CS2: MCU1.6 SPI.3 | length 143.5
  Bottom Layer w10: SPI.3 682.2,1037.8 MCU1.6
SPI1_CS3: MCU1.10 SPI.4 | length 380.2
  Top Layer w10: SPI.4 618,1002 618,1078 650,1110 682,1110 721,1149 v1(721,1174)
  Bottom Layer w10: v1(721,1174) 754.84,1140.16 MCU1.10
SPI1_MISO: IC3.7 MCU1.12 SPI.6 | length 1306.9
  Top Layer w10: SPI.6 742.25,760 748,754.25 748,687.5 761.5,674 787.5,674 800,686.5 800,735 891.39,735 905,748.61 905,873.23 906,874.23 906,1010.06 864,1052.06 864,1075 879,1090 929,1090 v1(954,1115) ; v1(1127.57,1110) 1162.21,1075.35 1162.21,994.79 1182,975 1182.5,975 1191.16,966.34 v1(1196.57,966.34)
  Bottom Layer w10: v1(954,1115) 954.43,1114.57 MCU1.12 1123,1114.57 v1(1127.57,1110) ; v1(1196.57,966.34) 1196.57,960.93 1215,942.5 IC3.7
SPI1_SCK: IC3.5 MCU1.11 SPI.5 | length 1332.2
  Top Layer w10: v1(864,947) 864,1005.5 848,1021.5 848,1091.5 862.5,1106 882,1106 v1(920,1144)
  Bottom Layer w10: SPI.5 660,832 702,790 792,790 792,864.7 812.24,884.93 826.93,884.93 847,905 847,930 v1(864,947) ; v1(920,1144) 959.16,1144 963,1140.16 MCU1.11 1046,1140.16 1046,1136 1155,1136 1191,1100 1191,1016 1240,967 1240,812.5 1252.5,800 1292.13,800 1299.2,807.07 1299.2,815.2 1315,831 IC3.5
SWCLK: MCU1.20 SWD.2 | length 498.9
  Bottom Layer w10: MCU1.20 1064.16,910 1112.5,910 1125,897.5 1125,862 1060,797 1060,540 SWD.2
SWDIO: MCU1.19 SWD.4 | length 829.8
  Bottom Layer w10: SWD.4 910.92,499.08 1097.5,499.08 1110.92,512.5 1110.92,560.08 1081.36,589.64 1081.36,788.36 1141,848 1141,920.4 1125.96,935.43 MCU1.19
T+: IC3.3 K1.1 | length 160.3
  Bottom Layer w10: K1.1 1260,1129 1265,1124 IC3.3
T-: IC3.2 K1.2 | length 281
  Bottom Layer w10: IC3.2 1215,1166 1210,1171 1210,1270 K1.2
UART2_RX: BLE.2 MCU1.9 | length 266.5
  Bottom Layer w10: BLE.2 583,1118 706.57,1118 710,1114.57 MCU1.9
UART2_TX: BLE.3 MCU1.8 | length 325.4
  Bottom Layer w10: BLE.3 545,1014.5 632.41,1101.91 694.18,1101.91 707.11,1088.98 MCU1.8
VDDA: FB_VDDA.1 MCU1.5 | length 1377.9
  Bottom Layer w10: MCU1.5 650,1012.2 576.8,939 525,939 504,960 504,1100 538,1134 586,1134 586,1155.42 646.58,1216 753,1216 763,1206 1180,1206 1180,1340 FB_VDDA.1
pads on no net: IC3.8

## Keep-outs
Keep-Out Layer:
  circle w10: c984.25,984.25 r551.18
  lines w10: 1404.21,628.94 cw(c1450,690) 1482.28,759.16

## Silkscreen, mask and mechanical layers (free items; w line width, h text height)
Top Overlay:
  lines w10: 1405.54,625.78 cw(c1450,690) 1488.75,757.81
  text "v" at 910,1505 h40
  text "g" at 730,1438.33 h40
  text "d" at 1190,1420 h40
  text "G" at 600,1315 h40
  text "T+" at 1415,1170 h40
  text "." at 925,1120 h40
  text "G" at 1010,1105 h40
  text "R" at 455,1060 h40
  text "V" at 460,850 h40
  text "+" at 1005,803.34 h40
  text "r" at 805,470 h40
  text "g" at 955,468.33 h40
  text "c" at 1050,465 h40
  text "v" at 1130,465 h40
  text "d" at 870,460 h40
Bottom Overlay:
  lines w10: 1403.14,627.52 cw(c1450,690) 1487.03,758.77
  text "G" at 765,1420 h40
  text "G" at 755,1240 h40
  text "G" at 1068.26,1201.25 h40
  text "V" at 854.2,1190.32 h40
  text "T+" at 1475,1190 h40
  text "V" at 755,1140 h40
  text "G" at 485,1125 h40
  text "R" at 480,1060 h40
  text "CS" at 780,1035 h40
  text "v604" at 485,895 h40 r90
  text "C" at 745,835 h40
  text "V" at 1080,770 h40
  text "R" at 815,470 h40
  text "D" at 880,465 h40
  text "G" at 980,465 h40
  text "C" at 1080,465 h40
  text "V" at 1160,465 h40